# Altium PCB Tx_OpAmp_PCB.PcbDoc
Units mm, origin at the board's own origin, x right, y up, seen from the top; angles counter-clockwise.
Board outline 75 x 50 mm, 2 copper layers (Top Layer, Bottom Layer); 37 components, 17 nets, 88 pads, 2 vias.
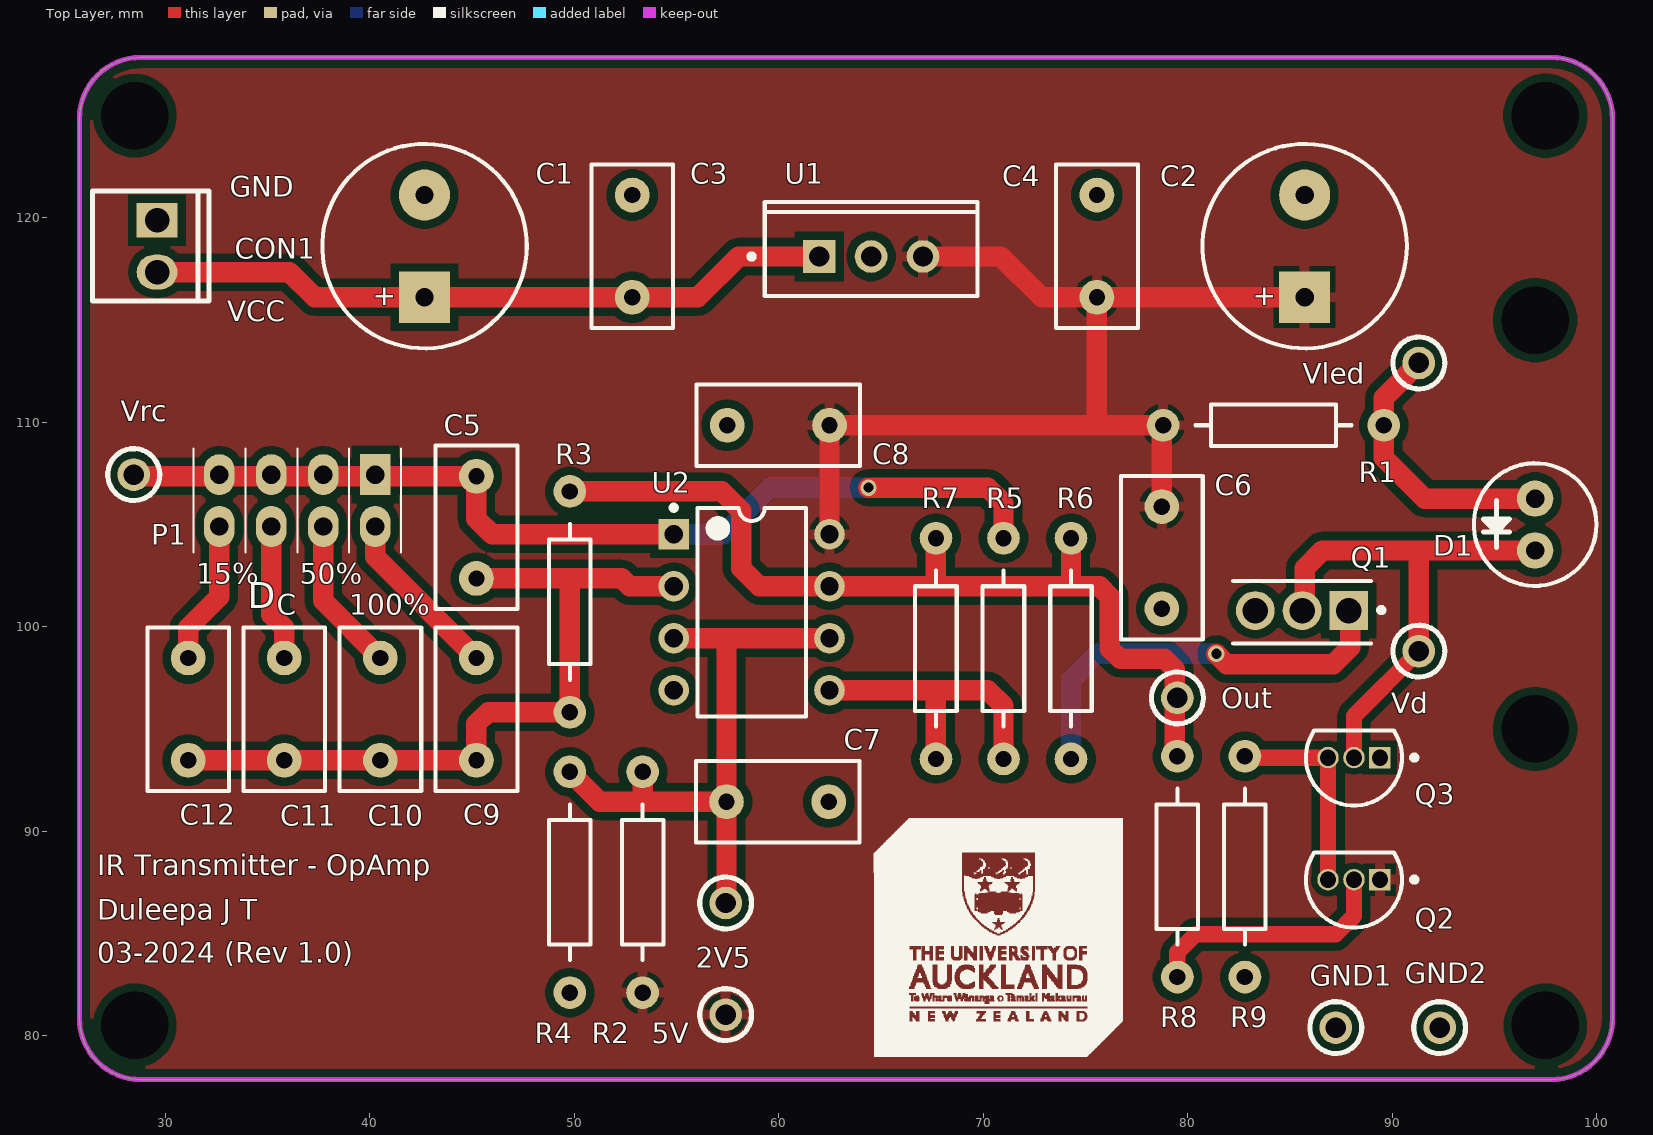
[diagram p0: Top Layer view]
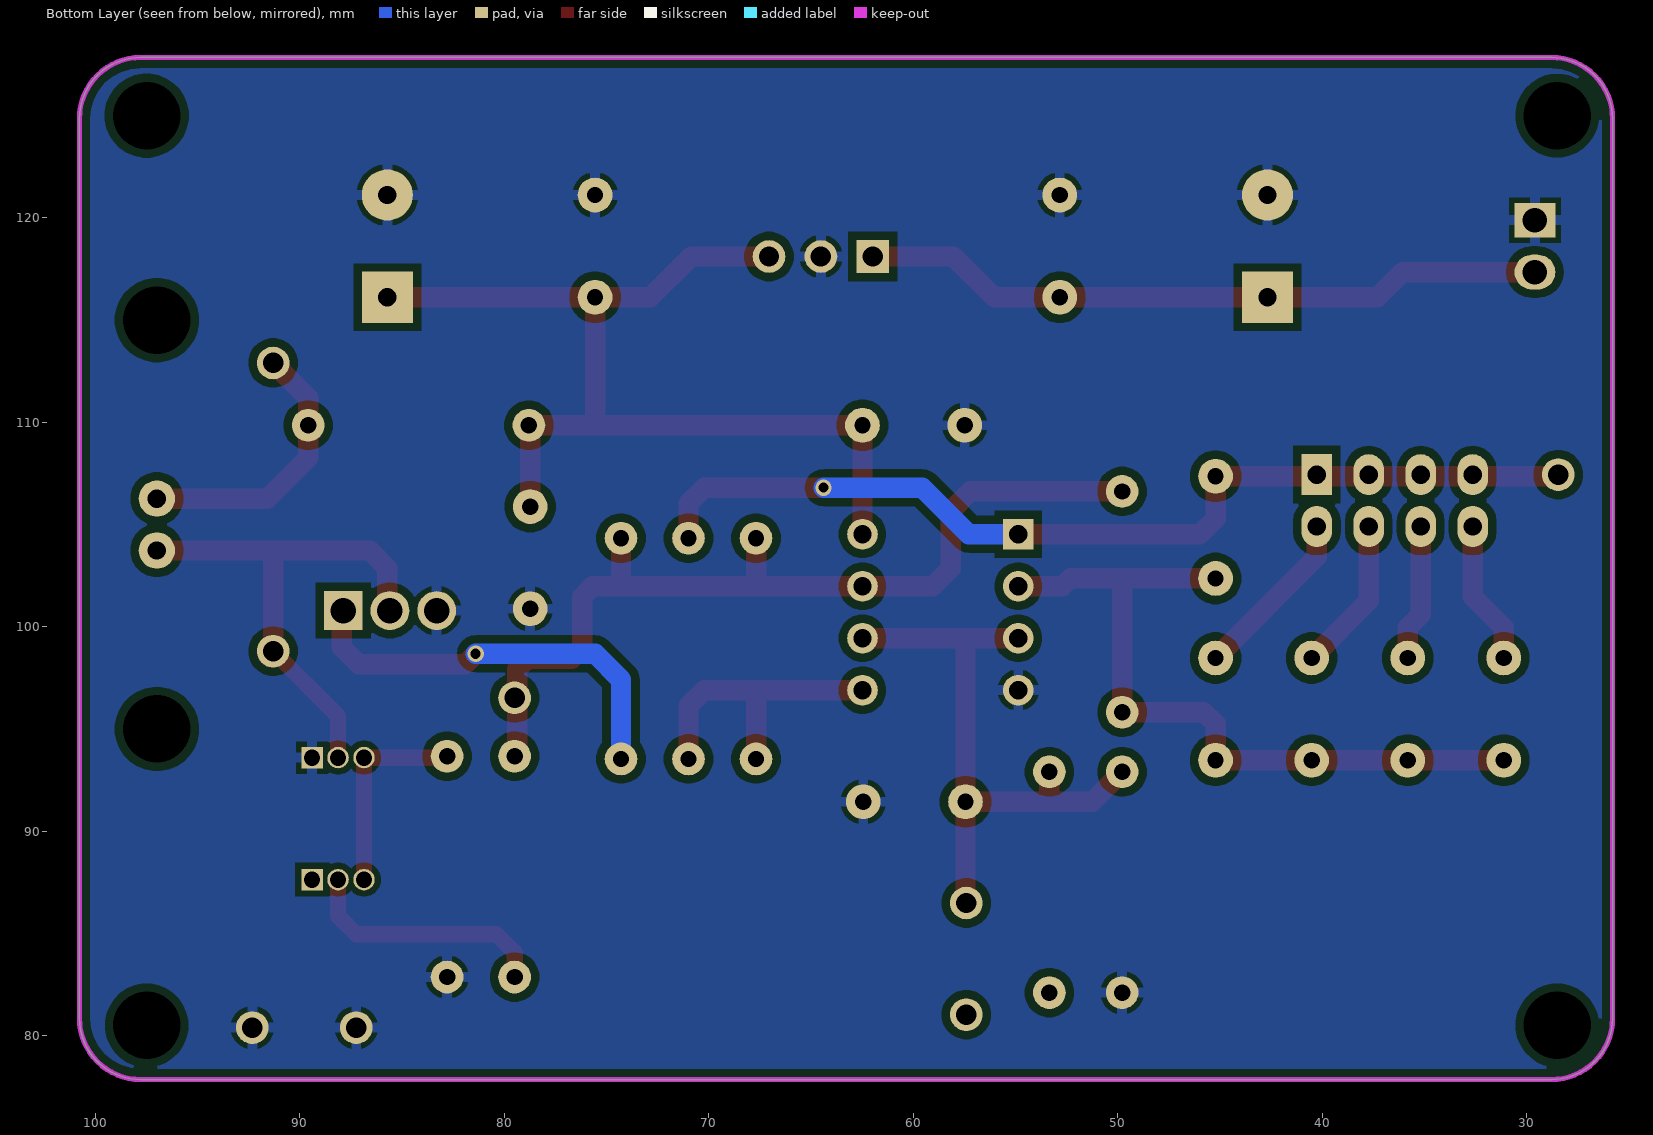
[diagram p1: Bottom Layer view, seen from below]
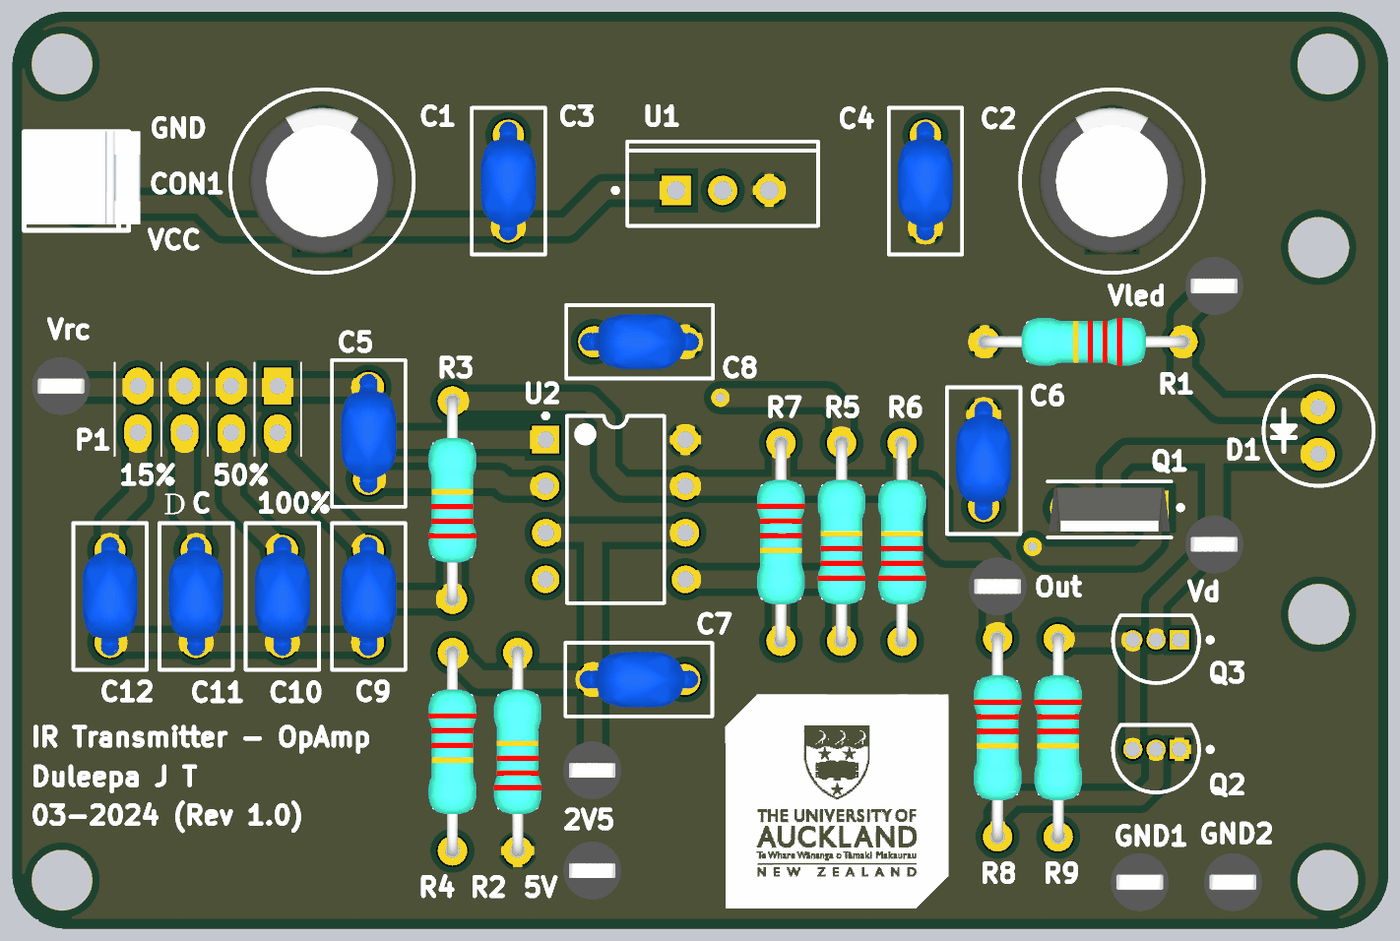
[diagram p2: 3D render of the assembled board from above, using the file's embedded part models]

## Layer stack, top to bottom
Top Solder: solder mask 0.0102, Solder Resist, Dk 3.5
Top Layer: signal copper 0.0356
Dielectric 1: dielectric 0.32, FR-4, Dk 4.8
Bottom Layer: signal copper 0.0356
Bottom Solder: solder mask 0.0102, Solder Resist, Dk 3.5

## Board outline
25.79,80.851 25.79,124.851 cw(c28.79,124.851) 28.79,127.851 97.79,127.851 cw(c97.79,124.851) 100.79,124.851 100.79,80.851 cw(c97.79,80.851) 97.79,77.851 28.79,77.851 cw(c28.79,80.851)

## Design rules (kind name [scope] priority, off if disabled: settings)
BoardOutlineClearance [All] p1: gap=0.3 ignorepadtopadclearanceinfootprint=FALSE except(0.4: Arc-SplitBarrior Arc-SplitContinuation Track-SplitBarrior Track-SplitContinuation SMDPad-SplitBarrior SMDPad-SplitContinuation THPad-SplitBarrior THPad-SplitContinuation Via-SplitBarrior Via-SplitContinuation Fill-SplitBarrior Fill-SplitContinuation Poly-SplitBarrior Poly-SplitContinuation Region-SplitBarrior Region-SplitContinuation Text-SplitBarrior Text-SplitContinuation)
Clearance BJT [InComponent('Q2') or InComponent('Q3')] p1: gap=0.3 ignorepadtopadclearanceinfootprint=TRUE
Clearance [All] p2: gap=0.4 ignorepadtopadclearanceinfootprint=TRUE
Height [All] p1: minheight=0 maxheight=50 prefheight=12.7
HoleSize [All] p1: absolutevalues=TRUE maxlimit=12 minlimit=0.25 maxpercent=80.000 minpercent=20.000
MinimumAnnularRing [All] p1: minimumring=0.13
MinimumSolderMaskSliver [All] p1: minsoldermaskwidth=0.1
PolygonConnect PolygonConnect_1 [All] p1: thpad.connectstyle=Relief thpad.reliefconductorwidth=0.508 thpad.reliefentries=4 thpad.polygonreliefangle="90 Angle" thpad.airgapwidth=0.254 smdpad.connectstyle=Relief smdpad.reliefconductorwidth=0.508 smdpad.reliefentries=4 smdpad.polygonreliefangle="90 Angle" smdpad.airgapwidth=0.254 via.connectstyle=Direct via.reliefconductorwidth=0.508 via.reliefentries=4 via.polygonreliefangle="90 Angle" via.airgapwidth=0.254
RoutingCorners [All] p1: cornerstyle=Round minsetback=2.54 maxsetback=2.54
RoutingVias [All] p1: holewidth=0.4 width=0.65 viastyle="Through Hole" minholewidth=0.25 minwidth=0.4 maxholewidth=1 maxwidth=2
SilkToSilkClearance [All] p1: silktosilkclearance=0.1
SilkToSolderMaskClearance [IsPad] p1: minsilkscreentomaskgap=0.1 clearancetoexposedcopper=TRUE
SolderMaskExpansion [All] p1: expansion=0.102 istentingtop=FALSE
SupplyNets "Schematic Supply Nets_15" [InNet('Vrc1')] p1: voltage=0.000
SupplyNets "Schematic Supply Nets_14" [InNet('Vrc2')] p2: voltage=0.000
SupplyNets "Schematic Supply Nets_13" [InNet('2V5')] p3: voltage=0.000
SupplyNets "Schematic Supply Nets_12" [InNet('Vled')] p4: voltage=0.000
SupplyNets "Schematic Supply Nets" [InNet('Vd')] p5: voltage=0.000
SupplyNets "Schematic Supply Nets_11" [InNet('Vc_25p')] p6: voltage=0.000
SupplyNets "Schematic Supply Nets_10" [InNet('Vc_100p')] p7: voltage=0.000
SupplyNets "Schematic Supply Nets_9" [InNet('GND')] p8: voltage=0.000
SupplyNets "Schematic Supply Nets_8" [InNet('VCC')] p9: voltage=0.000
SupplyNets "Schematic Supply Nets_7" [InNet('Vc_75p')] p10: voltage=0.000
SupplyNets "Schematic Supply Nets_6" [InNet('5V')] p11: voltage=0.000
SupplyNets "Schematic Supply Nets_5" [InNet('Out')] p12: voltage=0.000
SupplyNets "Schematic Supply Nets_2" [InNet('Vc_50p')] p13: voltage=0.000
Width [All] p1: maxlimit=10.16 minlimit=0.127 preferedwidth=0.508
24 further rules are at their usual default settings.

## Classes and differential pairs
component class Tx_OpAmp_Sch: 2V5 5V C1 C2 C3 C4 C5 C6 C7 C8 C10 C11 C12 CON1 D1 GND1 GND2 Out P1 Q1 Q2 Q3 R1 R3 R5 R6 R7 R8 R9 U1 U2 Vd Vled Vrc

## Components (designator, comment, footprint, x,y, rotation, side; value= is the part's Value field where it differs from the comment)
2V5 "TP TH" TP_TH_2.5mm 57.404,86.487 r0 top
5V "TP TH" TP_TH_2.5mm 57.404,81.026 r0 top
C1 "ECAP" CR05 42.672,118.618 r90 top
C2 "ECAP" CR05 85.725,118.618 r90 top
C3 "CCAP_TH_5P0" CCAP_5P0 52.832,118.618 r270 top
C4 "CCAP_TH_5P0" CCAP_5P0 75.565,118.618 r270 top
C5 "CCAP_TH_5P0" CCAP_5P0 45.212,104.862 r270 top
C6 "CCAP_TH_5P0" CCAP_5P0 78.74,103.378 r90 top
C7 "CCAP_TH_5P0" CCAP_5P0 59.944,91.44 r0 top
C8 "CCAP_TH_5P0" CCAP_5P0 59.984,109.855 r0 top
C9 "CCAP_TH_5P0" CCAP_5P0 45.212,95.972 r90 top
C10 "CCAP_TH_5P0" CCAP_5P0 40.513,95.972 r90 top
C11 "CCAP_TH_5P0" CCAP_5P0 35.814,95.972 r90 top
C12 "CCAP_TH_5P0" CCAP_5P0 31.115,95.972 r90 top
CON1 "HDR2X1" HDR2X1_2P54 29.591,119.888 r0 top
D1 "LED_TH" TH_LED 97,105 r270 top
GND1 "TP TH" TP_TH_2.5mm 87.249,80.391 r0 top
GND2 "TP TH" TP_TH_2.5mm 92.329,80.391 r0 top
Out "TP TH" TP_TH_2.5mm 79.502,96.52 r0 top
P1 "HDR4X2" HDR4X2-2P54 40.259,107.442 r180 top
Q1 "IRLU024" FP-PG-TO251-3-MFG 85.598,100.711 r270 top
Q2 "BC547B" ONSC-TO-92-3-29-11 88.138,87.63 r180 top
Q3 "BC639" ONSC-TO-92-3-29-11 88.138,93.599 r180 top
R1 "RESAX4" RAX4 84.201,109.855 r180 top
R2 "RESAX4" RAX4 53.34,87.503 r90 top
R3 "RESAX4" RAX4 49.784,101.219 r90 top
R4 "RESAX4" RAX4 49.784,87.503 r270 top
R5 "RESAX4" RAX4 70.993,98.933 r90 top
R6 "RESAX4" RAX4 74.295,98.933 r90 top
R7 "RESAX4" RAX4 67.691,98.933 r270 top
R8 "RESAX4" RAX4 79.502,88.265 r270 top
R9 "RESAX4" RAX4 82.804,88.265 r270 top
U1 "REG78M05" TO220_Reg 64.516,118.11 r90 top
U2 "TLC082IP" P0008A 58.674,100.711 r0 top
Vd "TP TH" TP_TH_2.5mm 91.313,98.806 r0 top
Vled "TP TH" TP_TH_2.5mm 91.313,112.903 r0 top
Vrc "TP TH" TP_TH_2.5mm 28.448,107.442 r0 top

## Footprints (in the part's own frame and the unit in brackets; to place one, negate y for a bottom-side part, rotate by r counter-clockwise, add the part's x,y. Pads: shape width x height; smd on the part's side, far side on the other; paste and mask are expansions set on the pad)
CCAP_5P0 [mm]
  round 1.7 hole 0.8: 1(-2.5,0) 2(2.5,0)
  silkscreen extent -4,-2 4,2, body extent -3.25,-1.5 3.25,1.5, height 6.5
CR05 [mm]
  rect 2.5x2.5 hole 0.9: 1(-2.5,0)
  round 2.5 hole 0.9: 2(2.5,0)
  silkscreen extent -5,-5 5,5, body extent -4,-3.99 4,3.99, height 11.5
FP-PG-TO251-3-MFG [mm]
  rect 1.9x1.9 hole 1.25 paste-2539.97 mask+0: 1(-0.08,2.286)
  round 1.9 hole 1.25 paste-2539.97 mask+0: 2(-0.08,0) 3(-0.08,-2.286)
  silkscreen extent -1.53,-3.36 1.53,4, body extent -1.39,-3.56 1.39,3.56, height 0.25
HDR2X1_2P54 [mm] "Polarised Header 2 way"
  rect 2x1.7 hole 1.2: 1(0,0)
  oval 2x1.7 hole 1.2: 2(0,-2.54)
  silkscreen extent -3.16,-3.96 2.54,1.42, body extent -3.3,-3.64 3.18,1.44, height 10.09
HDR4X2-2P54 [mm]
  rect 1.5x2 hole 0.9: 1(0,0)
  oval 1.5x2 hole 0.9 paste-2539.97: 2(0,2.54)
  oval 1.5x2 hole 0.9: 3(2.54,0) 4(2.54,2.54) 5(5.08,0) 6(5.08,2.54) 7(7.62,0) 8(7.62,2.54)
  silkscreen extent -1.27,-1.27 8.89,3.81
ONSC-TO-92-3-29-11 [mm] "TO, 3-Leads, Body Dia 4.7mm, Pitch 1.27mm"
  rect 1.05x1.05 hole 0.8: 1(-1.27,0)
  round 1.05 hole 0.8: 2(0,0) 3(1.27,0)
  silkscreen extent -3.08,-1.34 2.35,2.35, body extent -2.35,-1.33 2.36,2.36, height 7.87
P0008A [mm] "DIP, 8-Leads, Body 10.15x6.6mm, Pitch 2.54mm"
  rect 1.5x1.5 hole 0.9: 1(-3.81,3.81)
  round 1.5 hole 0.9: 2(-3.81,1.27) 3(-3.81,-1.27) 4(-3.81,-3.81) 5(3.81,-3.81) 6(3.81,-1.27) 7(3.81,1.27) 8(3.81,3.81)
  silkscreen extent -3.93,-5.1 2.65,5.23, body extent -3.95,-5.07 3.95,5.07, height 5.08
RAX4 [mm]
  round 1.6 hole 0.8: 1(-5.4,0) 2(5.4,0)
  silkscreen extent -3.81,-1.02 3.81,1.02, body extent -5.7,-1.3 5.7,1.3, height 2.7
TH_LED [mil]
  round 70 hole 35.43: 1(50,0) 2(-50,0)
  silkscreen extent -118,-118 118,118, body extent -98,-98 98,98, height 413
TO220_Reg [mm] "FM, 3-Leads, Body 10.03x8.98mm, Pitch 2.54mm"
  rect 1.6x1.6 hole 1: 1(0,2.54)
  round 1.6 hole 1: 3(0,-2.54) 4(0,0)
  silkscreen extent -1.93,-5.2 2.67,5.97, body extent -1.93,-5.2 2.67,5.2, height 20.75
TP_TH_2.5mm [mm] "Keystone through hole TP"
  round 1.6 hole 1: 1(0,0)
  silkscreen extent -1.27,-1.27 1.27,1.27, body extent -1.59,-1.59 1.59,1.59, height 5.59

## Part data
2V5 5V GND1 GND2 Out Vd Vled Vrc: library part CMP-046-000000-3, "Testpoint through hole / Keystone compact / 5000 - Red / 5001 - Black / 5002 - White / 5003 - Orange / 5004 - Yellow", Design Item ID="TP TH", Source="UoAPE_Connectors and Mechanical.SchLib"
C1 C2: library part CMP-003-000000-2, Design Item ID=ECAP, Source=CommonSymbols_V1.SchLib
C3 C4 C5 C6 C7 C8 C9 C10 C11 C12: library part CMP-001-00023-1, "TH ceramic cap with 5mm pitch", Design Item ID=CCAP_5P0
CON1: library part CMP-004-000000-7, "Header 2X1", Design Item ID=HDR2X1, Source=CommonSymbols_V1.SchLib
D1: library part CMP-007-00002-1, "LED RED TH"
P1: library part CMP-002-00015-5, "Header, 8-Pin, Dual row", Design Item ID=HDR3X2, Source=CommonSymbols_V1.SchLib
Q1: library part CMP-013-00004-1, "Power Field-Effect Transistor, 80A I(D), 75V, 0.009ohm, 1-Element, N-Channel, Silicon, Metal-oxide Semiconductor FET, TO-251AA", Avalanche Energy Rating (Eas)=120mJ, Case Connection=DRAIN, Drain Current-Max (Abs) (ID)=80A, Drain-source On Resistance-Max=9mR, DS Breakdown Voltage-Min=75V, Max Operating Temperature=175°C, Operating Mode="ENHANCEMENT MODE", Package Body Material=Plastic, Package Shape=Rectangular, Package Style=IN-LINEMeter, Peak Reflow Temperature (Cel)=260°C, Power Dissipation-Max (Abs)=140W, Pulsed Drain Current-Max (IDM)=310A, Time @ Peak Reflow Temperature-Max (s)=30s, Drain Current-Max (ID)=80A, FET Technology="METAL-OXIDE SEMICONDUCTOR", JEDEC-95 Code=TO-251AA, JESD-30 Code=R-PSIP-T3, JESD-609 Code=e3, Moisture Sensitivity Level=1, Number of Elements=1, Pins=3, Polarity/Channel Type=N-CHANNEL, Qualification Status="Not Qualified", Reach SVHC Compliant=Yes, RoHS Compliant=Yes, Surface Mount=No, Terminal Finish=Nickel, Terminal Form="Through Hole", Terminal Position=SINGLE, Transistor Application=SWITCHING, Transistor Element Material=SILICON
Q2: library part CMP-013-00006-1, "Small Signal Bipolar Transistor, 0.1A I(C), 45V V(BR)CEO, 1-Element, NPN, Silicon, TO-92", RoHS Compliant=Yes
Q3: library part CMP-013-00005-1, "Small Signal Bipolar Transistor, 1A I(C), 80V V(BR)CEO, 1-Element, NPN, Silicon, TO-92", Collector-emitter Voltage-Max=80V, DC Current Gain-Min (hFE)=40, Frequency=200MHz, Max Collector Current=1A, Max Operating Temperature=150°C, Package Body Material=Plastic, Package Shape=Round, Package Style=CYLINDRICALMeter, Peak Reflow Temperature (Cel)=240°C, Power Dissipation-Max (Abs)=800mW, Time @ Peak Reflow Temperature-Max (s)=30s, JEDEC-95 Code=TO-92, JESD-30 Code=O-PBCY-T3, JESD-609 Code=e0, Number of Elements=1, Pins=3, Polarity/Channel Type=NPN, Qualification Status="Not Qualified", Reach SVHC Compliant=No, RoHS Compliant=No, Surface Mount=No, Terminal Finish=Tin, Terminal Form="Through Hole", Terminal Position=BOTTOM, Transistor Element Material=SILICON
R1 R2 R3 R4 R5 R6 R7 R8 R9: library part CMP-010-000001-2, "Axial Resistor", Design Item ID=RESAX4, Source=CommonSymbols_V1.SchLib
U1: library part CMP-011-000018-2, "78M Series Linear Regulators", Design Item ID=REG78MXX, Source=CommonSymbols_V1.SchLib
U2: library part CMP-014-00006-1, "Operational Amplifier, 2 Func, 3000uV Offset-Max, BIMOS, PDIP8", Average Bias Current-Max (IIB)=700pA, Bias Current-Max (IIB) @25C=50pA, Case/Package=DIP, Frequency Compensation=YES, Input Offset Voltage-Max=3mV, Max Operating Temperature=125°C, Max Supply Current=7mA, Micropower=No, Min Operating Temperature=-40°C, Nominal Supply Voltage=5V, Package Body Material=Plastic, Package Equivalence Code=DIP8,.3, Package Shape=Rectangular, Package Style=IN-LINEMeter, Power=100mW, Power Supplies=+-2.25/+-8/4.5/16V, Supply Voltage Limit-Max=17V, Temperature Grade=AUTOMOTIVE, Voltage Gain-Min=100000, Amplifier Type="OPERATIONAL AMPLIFIER", Architecture=VOLTAGE-FEEDBACK, Channels=2, Common-mode Reject Ratio-Nom=110dB, Height - Seated (Max)=5.08mm, JESD-30 Code=R-PDIP-T8, JESD-609 Code=e4, Length=9.81mm, Low-Bias=Yes, Low-Offset=No, Packaging=Rail/Tube, Pins=8, Programmable Power=No, Qualification Status="Not Qualified", Reach SVHC Compliant=Yes, RoHS Compliant=Yes, Slew Rate=16V/µs, Slew Rate-Min=9.5V/µs, Surface Mount=No, Technology=BIMOS, Terminal Finish=Nickel, Terminal Form="Through Hole", Terminal Pitch=2.54mm, Terminal Position=DUAL, Unity Gain BW-Nom=10MHz, Wideband=No, Width=7.62mm

## Free pads (board coordinates)
  round 1.524 hole 3.3: 9(28.5,80.5) 9(28.5,125) 9(97,95) 9(97,115) 9(97.5,80.5) 9(97.5,125)

## Via types
v1: diameter 0.8, hole 0.5, Top Layer to Bottom Layer, 2 vias

## Nets (pads, with @x,y where several pads share a name; then routed paths per layer and width w, separated by ;. In a path a pad name is that pad's centre, name@x,y a point inside that pad or via, vN(x,y) a via of type N, cw(c..) or ccw(c..) an arc to the next point about the centre after c; other vN are vias at no path point)
2V5: 2V5.1 C7.1 R2.2 R4.1 U2.3 U2.6 | length 30.3
  Top Layer w1: R4.1 51.247,91.44 53.34,91.44 ; R2.2 53.34,91.44 ; U2.3 57.404,99.441 ; 2V5.1 57.444,86.527 C7.1 ; U2.6 57.404,99.441 ; 53.34,91.44 C7.1 ; 57.404,99.441 57.444,99.401 C7.1
5V: 5V.1 C2.1 C4.2 C6.2 C8.2 Q2.1 R1.2 R2.1 U1.3 U2.8 | length 51.4
  Top Layer w1: U2.8 C8.2 75.565,109.855 ; U1.3 70.866,118.11 72.858,116.118 C4.2 ; C6.2 78.74,109.794 R1.2 75.565,109.855 ; C2.1 C4.2 ; 75.565,109.855 C4.2
GND: C1.2 C2.2 C3.1 C4.1 C6.1 C7.2 C8.1 CON1.1 GND1.1 GND2.1 Q1.3 Q3.1 R4.2 R9.2 U1.4 U2.4
NetQ1_1: Q1.1 R6.1 | length 20.4
  Top Layer w1: v1(81.407,98.679) 81.915,98.171 87.122,98.171 87.95,98.999 87.95,100.725 Q1.1
  Bottom Layer w1: R6.1 74.295,97.409 75.565,98.679 v1(81.407,98.679)
NetQ2_2: Q2.2 R8.2 | length 12.4
  Top Layer w0.8: R8.2 79.502,84.074 80.391,84.963 87.249,84.963 88.138,85.852 Q2.2
NetQ2_3: Q2.3 Q3.3 R9.1 | length 10.1
  Top Layer w0.8: R9.1@82.87,93.599 Q3.3 Q2.3
  Top Layer w1: R9.1 R9.1@82.87,93.599
NetR5_1: R5.1 R7.2 U2.5 | length 14.9
  Top Layer w1: U2.5 67.564,96.901 ; R7.2 67.691,96.774 67.564,96.901 ; R5.1 70.993,96.139 70.231,96.901 67.564,96.901
Out: Out.1 R3.2 R6.2 R7.1 R8.1 U2.7 | length 45.4
  Top Layer w1: R3.2 57.211,106.619 58.166,105.664 58.166,102.87 59.055,101.981 U2.7 67.691,101.981 ; R7.1 67.691,101.981 ; R6.2@74.234,104.394 R6.2 74.295,101.981 ; R8.1 79.375,93.792 79.375,97.917 78.867,98.425 76.708,98.425 76.2,98.933 76.2,101.473 75.692,101.981 74.295,101.981 ; 67.691,101.981 74.295,101.981
Vc_25p: C12.2 P1.8 | length 7.1
  Top Layer w1: C12.2 31.115,99.949 32.639,101.473 P1.8
Vc_50p: C11.2 P1.6 | length 6.7
  Top Layer w1: P1.6 35.179,100.584 35.814,99.949 C11.2
Vc_75p: C10.2 P1.4 | length 7.6
  Top Layer w1: P1.4 37.719,101.266 C10.2
Vc_100p: C9.2 P1.2 | length 8.5
  Top Layer w1: P1.2 40.259,103.425 C9.2
VCC: C1.1 C3.2 CON1.2 U1.1 | length 33.7
  Top Layer w1: CON1.2 36.068,117.348 37.298,116.118 C1.1 C3.2 56.047,116.118 58.039,118.11 U1.1
Vd: D1.1 Q1.2 Q3.2 Vd.1 | length 25.3
  Top Layer w0.8: Q3.2 88.138,95.631 Vd.1
  Top Layer w1: Q1.2 85.725,100.918 85.725,102.87 86.585,103.73 91.44,103.73 ; Vd.1 91.313,103.603 91.44,103.73 ; D1.1 91.44,103.73
Vled: D1.2 R1.1 Vled.1 | length 13.6
  Top Layer w1: Vled.1 89.601,111.191 R1.1 89.601,108.265 91.596,106.27 D1.2
Vrc1: C5.2 C9.1 C10.1 C11.1 C12.1 R3.1 U2.2 | length 37
  Top Layer w1: C12.1 C9.1 45.212,95.25 45.781,95.819 R3.1 49.784,102.362 ; C5.2 49.784,102.362 ; U2.2 52.705,101.981 52.324,102.362 49.784,102.362
Vrc2: C5.1 P1.1 P1.3 P1.5 P1.7 R5.2 U2.1 Vrc.1 | length 47.9
  Top Layer w1: Vrc.1 28.528,107.362 C5.1 45.212,105.283 45.974,104.521 U2.1 ; v1(64.389,106.807) 70.231,106.807 70.993,106.045 R5.2
  Bottom Layer w1: U2.1 57.277,104.521 59.563,106.807 v1(64.389,106.807)

## Polygon pours and split planes (outlines as drawn)
5V on Top Layer "5V_L01_P000" (solid, pour order 0): 25.79,127.889 100.79,127.889 100.79,77.851 25.79,77.851
GND on Bottom Layer "GND_L02_P001" (solid, pour order 1): 25.79,127.889 100.79,127.889 100.79,77.851 25.79,77.851

## Keep-outs
Keep-Out Layer:
  the board outline again, w0.254

## Silkscreen, mask and mechanical layers (free items; w line width, h text height)
Top Overlay:
  drawing of 24 lines, arcs and shapes, not listed
  text "GND" at 33.147,121.031 h1
  text "VCC" at 33.02,114.935 h1
  text "15%" at 31.496,102.108 h1
  text "50%" at 36.576,102.108 h1
  text "C" at 35.433,100.584 h1
  text "100%" at 38.989,100.584 h1
  text "D" at 34.036,100.457 h2.2
  text "IR Transmitter - OpAmp" at 26.67,87.836 h1
  text "Duleepa J T" at 26.67,85.677 h1
  text "03-2024 (Rev 1.0)" at 26.67,83.566 h1
Mechanical 1:
  the board outline again, w0.254

## Text inside footprints (layer, text, board x,y; h text height)
C1: Top Overlay "+" at 41.148,115.57 h1 r90
C2: Top Overlay "+" at 84.201,115.57 h1 r90